# Altium PCB PCB2.PcbDoc
Units mil, origin at the board's own origin, x right, y up, seen from the top; angles counter-clockwise.
Board outline 1960 x 1700 mil, 2 copper layers (Top Layer, Bottom Layer); 12 components, 10 nets, 41 pads, 0 vias.
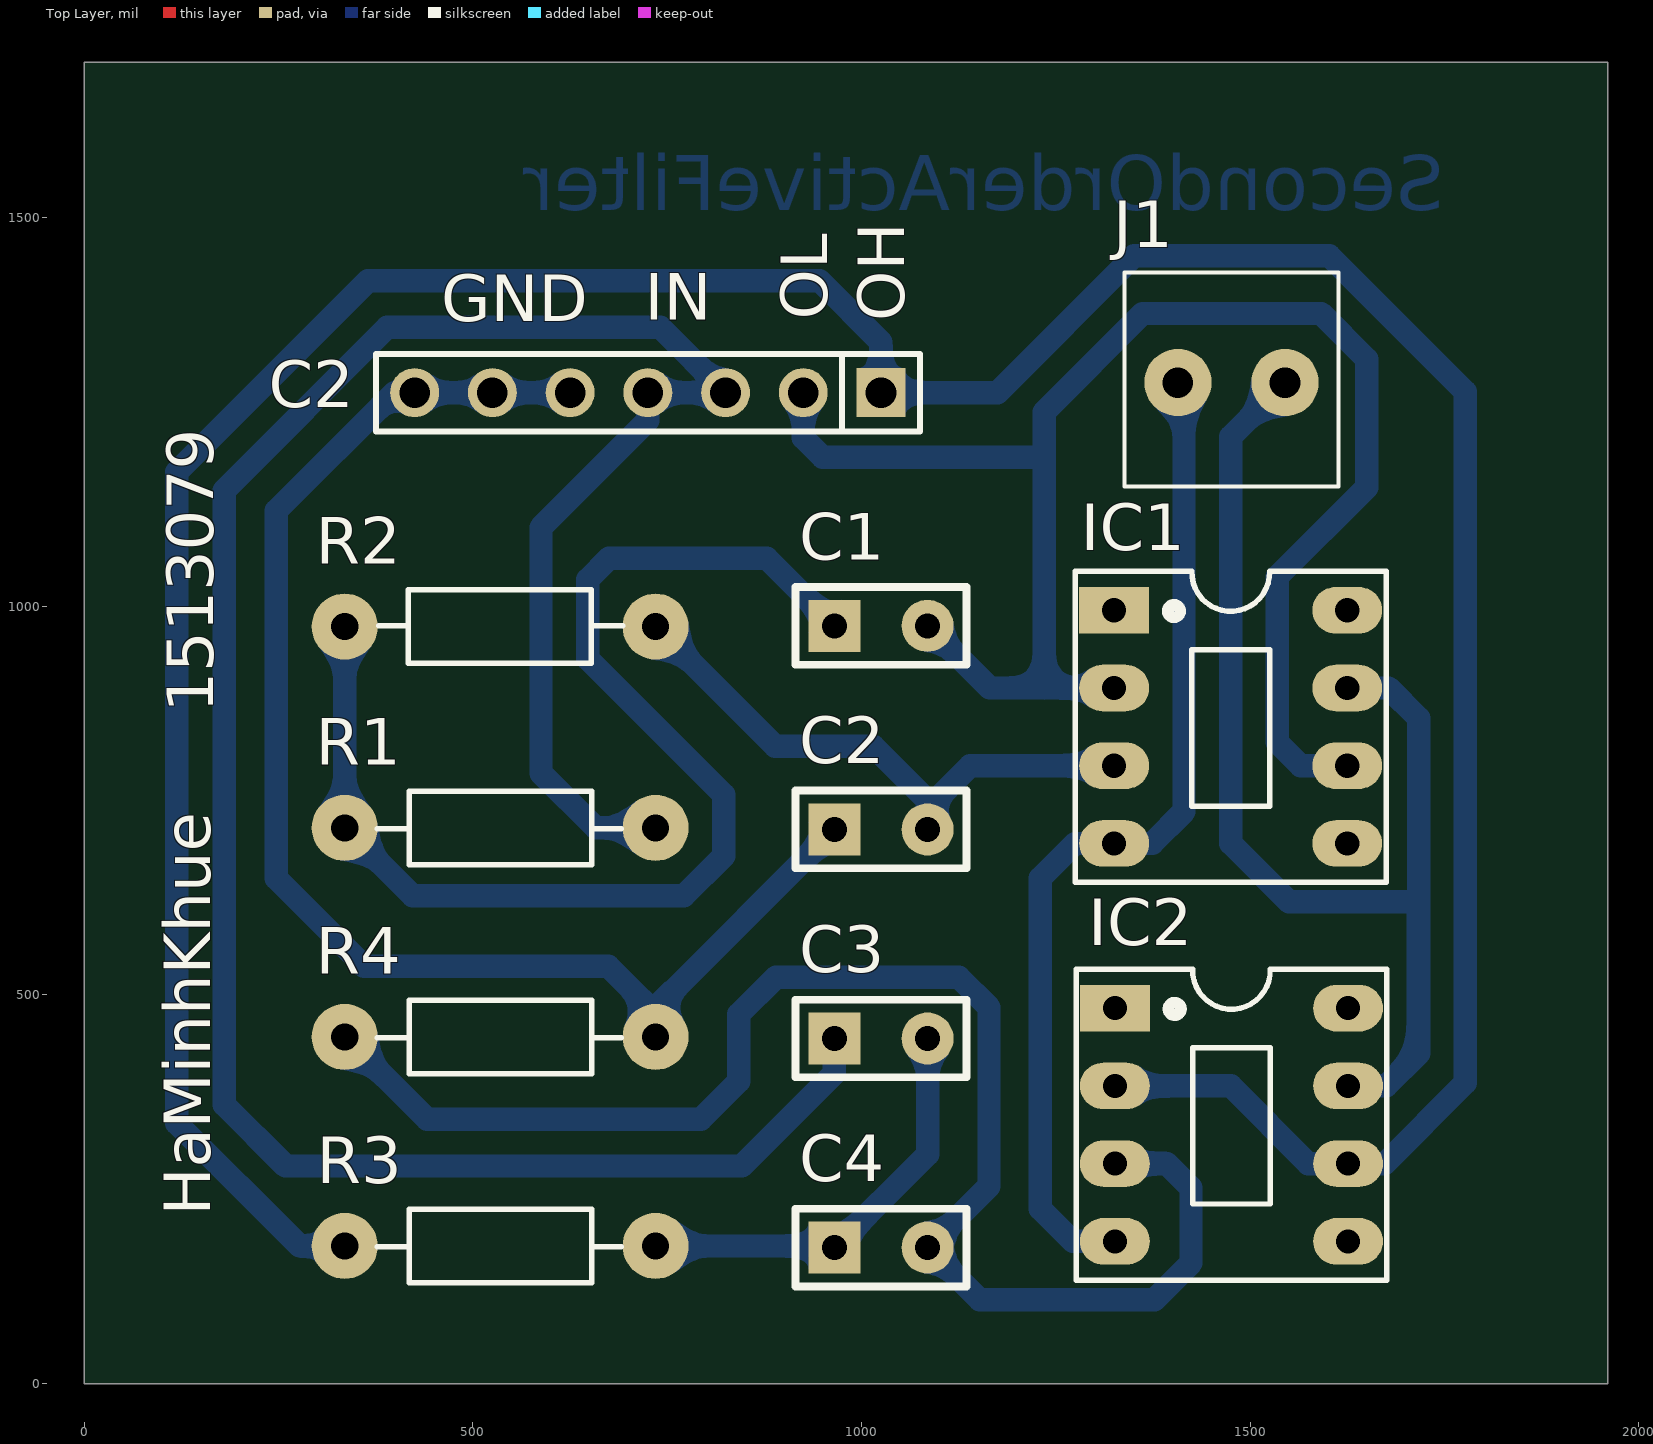
[diagram p0: Top Layer view]
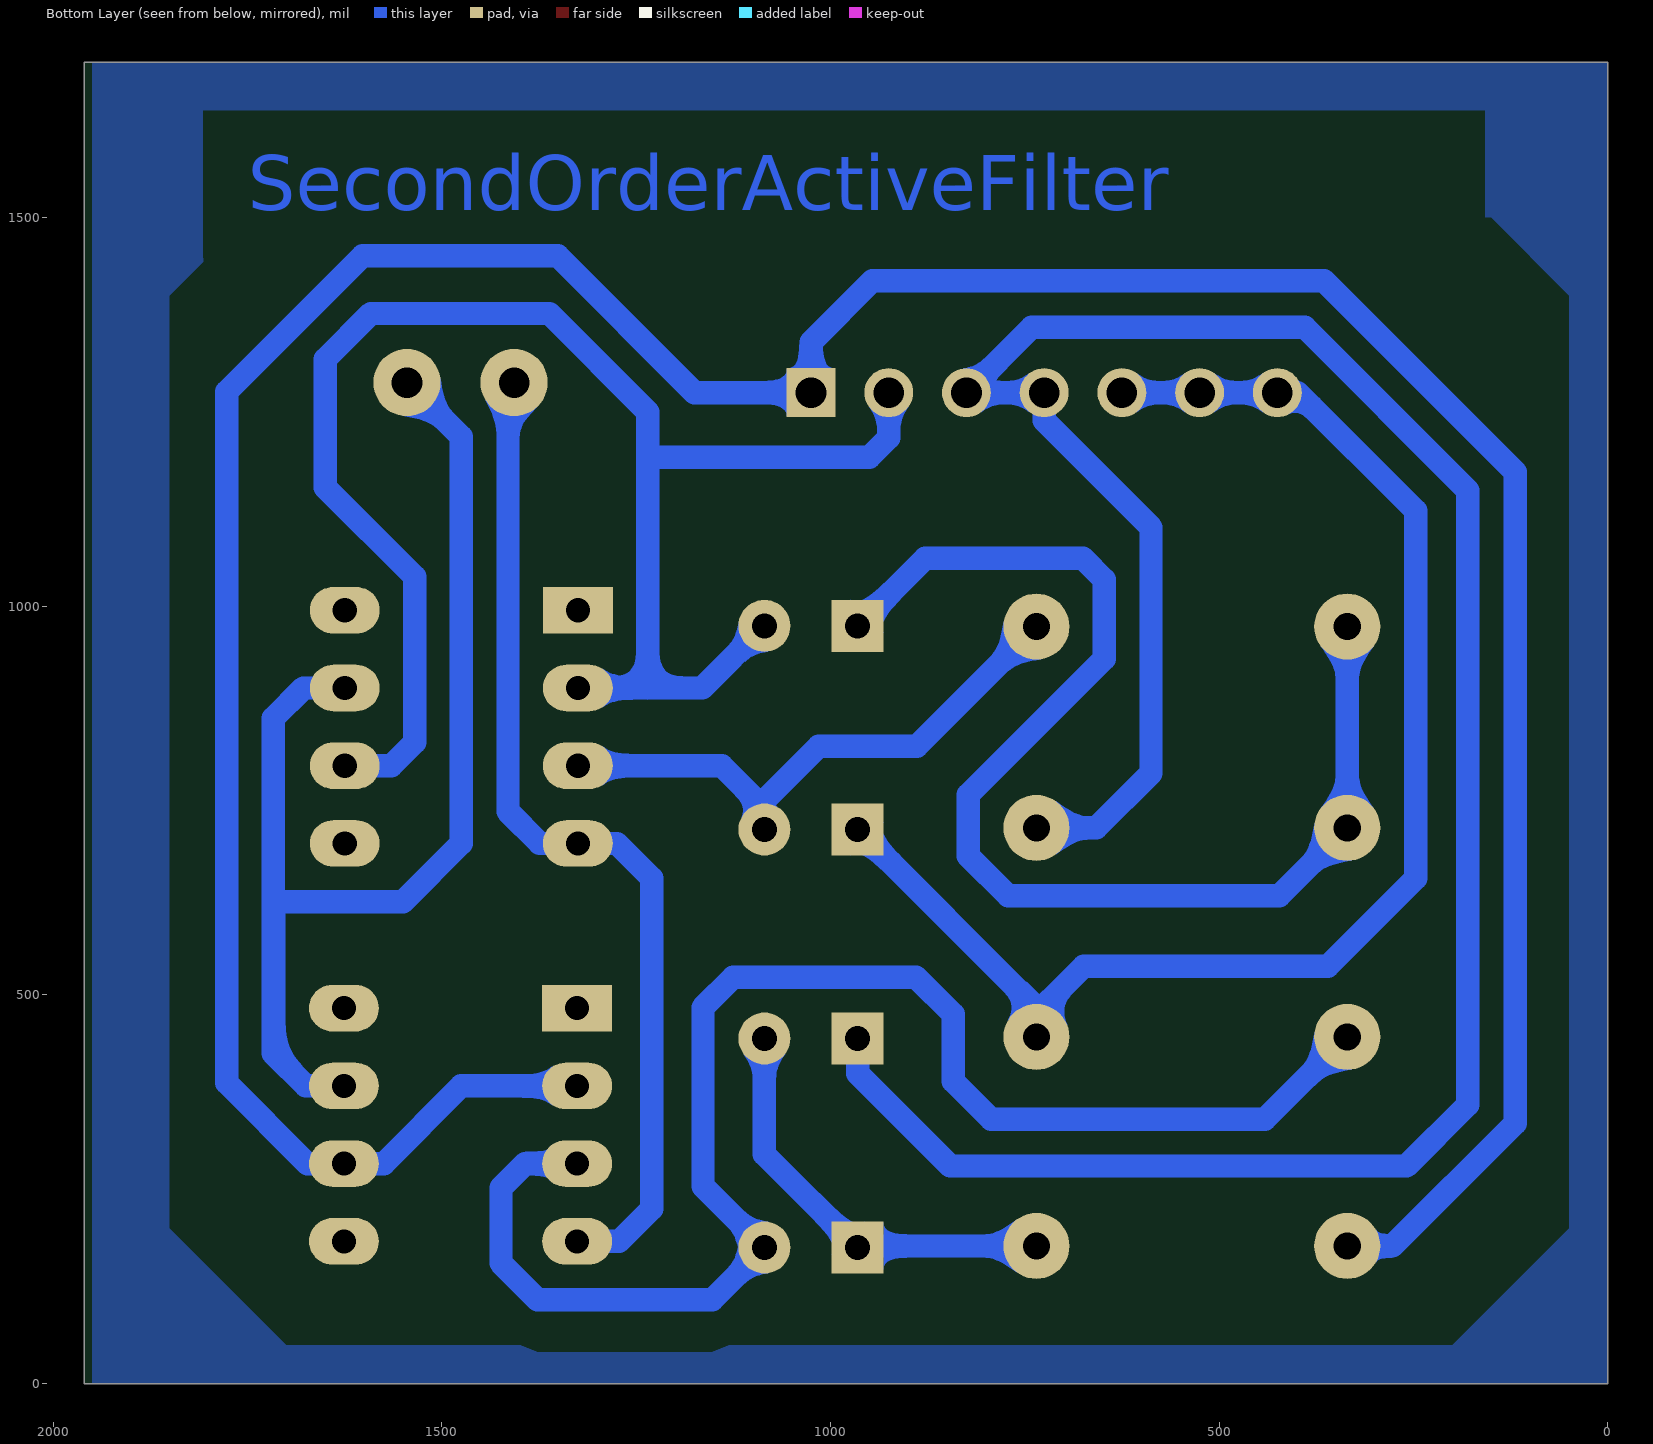
[diagram p1: Bottom Layer view, seen from below]
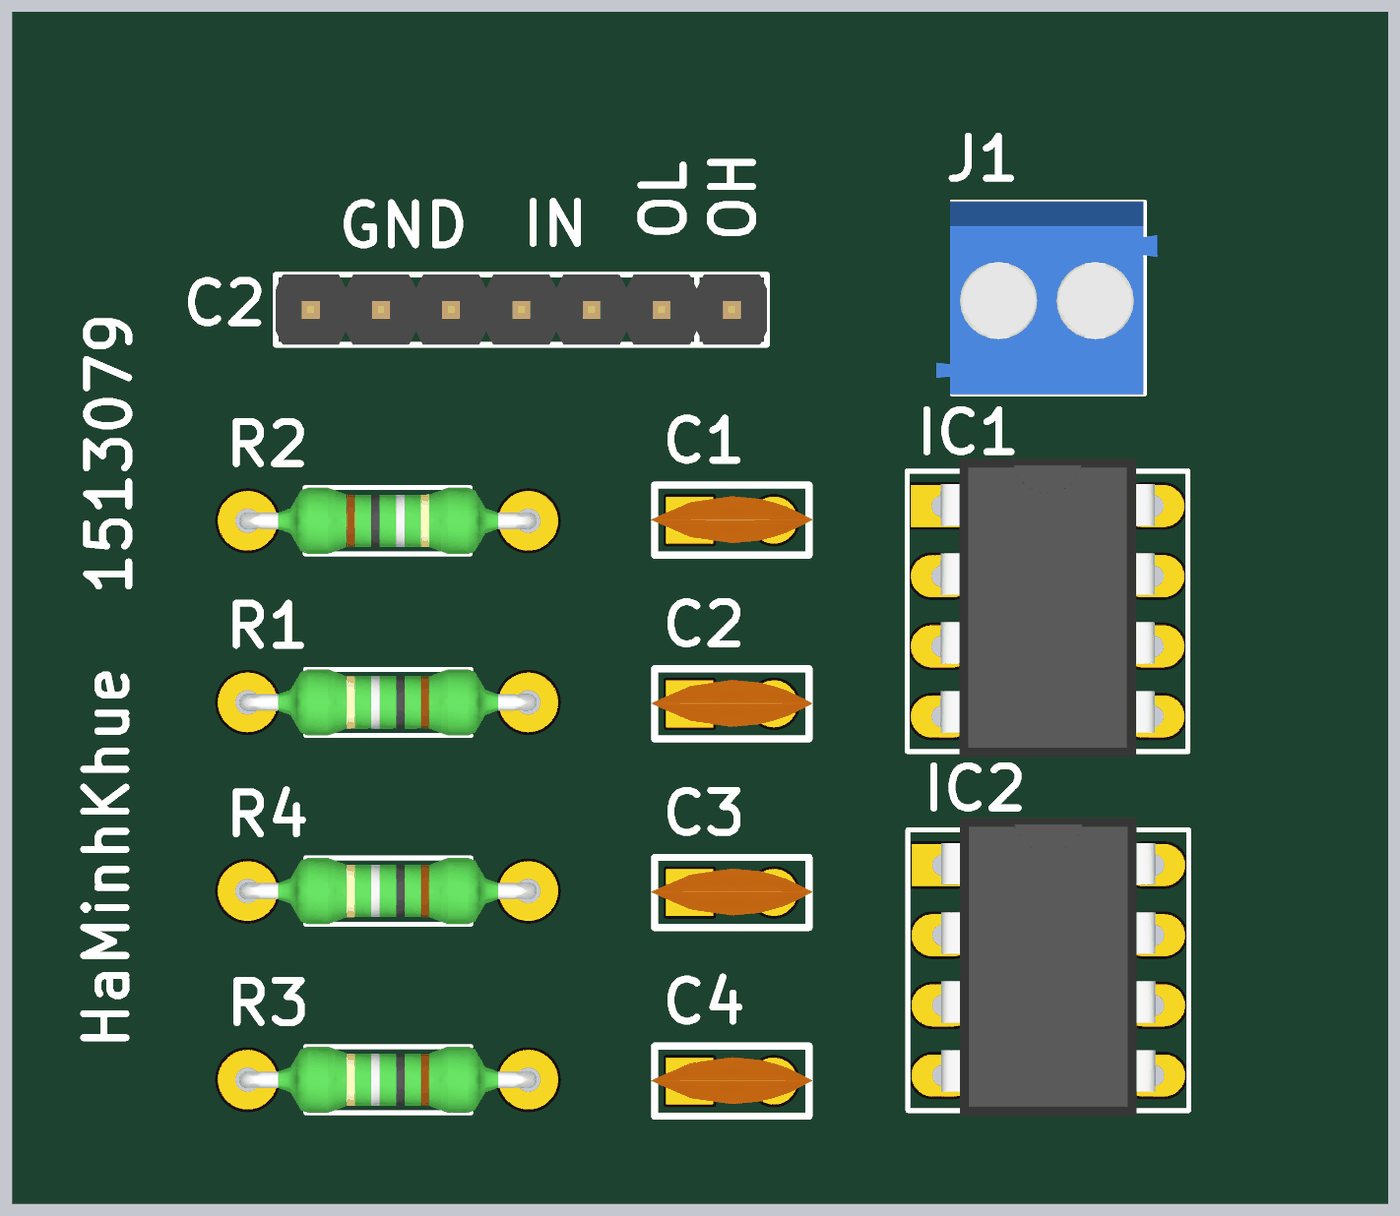
[diagram p2: 3D render of the assembled board from above, using the file's embedded part models]

## Layer stack, top to bottom
Top Solder: solder mask 0.4, Solder Resist, Dk 3.5
Top Layer: signal copper 1.4
Dielectric 1: dielectric 12.6, FR-4, Dk 4.8
Bottom Layer: signal copper 1.4
Bottom Solder: solder mask 0.4, Solder Resist, Dk 3.5

## Board outline
0,0 1960,0 1960,1700 0,1700

## Design rules (kind name [scope] priority, off if disabled: settings)
Clearance Clearance_1 [InPolygon] p1: gap=47.24
Clearance [All] p2: gap=30
PolygonConnect [All] p1: connectstyle=Relief reliefconductorwidth=10 reliefentries=4 polygonreliefangle="90 Angle" airgapwidth=10
RoutingLayers [All] p1: top layer_v5=FALSE bottom layer_v5=TRUE
RoutingVias [All] p1: holewidth=28 width=60 viastyle="Through Hole" minholewidth=28 minwidth=60 maxholewidth=28 maxwidth=60
SolderMaskExpansion [All] p1: expansion=4
Width [All] p1: maxlimit=30 minlimit=20 preferedwidth=30
29 further rules are at their usual default settings.

## Classes and differential pairs
component class Sheet1: C1 C2 C3 C4 IC1 IC2 J1 R1 R2 R3 R4

## Components (designator, comment, footprint, x,y, rotation, side; value= is the part's Value field where it differs from the comment)
C1 "Cap Non-pol" "Cap Non-Pol 3mm" 1025,975 r0 top
C2 "Cap Non-pol" "Cap Non-Pol 3mm" 1025,713 r0 top (schematic designator C3)
C2 "JP7" JP7-D1T 1025,1275 r180 top
C3 "Cap Non-pol" "Cap Non-Pol 3mm" 1025,444 r0 top (schematic designator C4)
C4 "Cap Non-pol" "Cap Non-Pol 3mm" 1025,175 r0 top (schematic designator C5)
IC1 "LM741" DIP8 1475,850 r270 top
IC2 "LM741" DIP8 1476,338 r270 top
J1 "KF2" KF2-3.5 1476,1288 r180 top
R1 "22K" RES-1/4W 550,710 r0 top
R2 "22K" RES-1/4W 520,979 r180 top
R3 "22K" RES-1/4W 550,172 r0 top
R4 "22K" RES-1/4W 550,441 r0 top

## Footprints (in the part's own frame and the unit in brackets; to place one, negate y for a bottom-side part, rotate by r counter-clockwise, add the part's x,y. Pads: shape width x height; smd on the part's side, far side on the other; paste and mask are expansions set on the pad)
"Cap Non-Pol 3mm" [mil] "Capacitor, Radial; Body 5.6 x 2.5 mm (L x W typ); Pin Spacing 3 mm (typ); Solder Pad 35mil"
  rect 67x67 hole 32: 1(-60,0)
  round 67 hole 32: 2(60,0)
  silkscreen extent -110,-50 110,50, body extent -115,-33 115,34, height 245
DIP8 [mil] "DIP, 8-Leads, Row Spacing 7.62mm, Pitch 2.54mm, Body 9.91x6.73mm"
  rect 60x90 hole 31: 1(-145,-150)
  oval 60x90 hole 31: 2(-45,-150) 3(55,-150) 4(155,-150) 5(155,150) 6(55,150) 7(-45,150) 8(-145,150)
  silkscreen extent -195,-200 205,200, body extent -213,-153 213,153, height 177
JP7-D1T [mm] "7 pins, 1 row, straight, gold plating"
  rect 1.6x1.6 hole 1: 1(0,0)
  round 1.6 hole 1: 2(2.54,0) 3(5.08,0) 4(7.62,0) 5(10.16,0) 6(12.7,0) 7(15.24,0)
  silkscreen extent -1.27,-1.27 16.51,1.27, body extent -1.27,-1.27 16.51,1.27, height 8.54
KF2-3.5 [mm] "3,50mm - modular - blue - Horizontal wire entry - Pressure clamp - 8,4mm height - 02p"
  round 2.2 hole 1: 1(-1.75,0) 2(1.75,0)
  silkscreen extent -3.5,-3.6 3.5,3.4, body extent -3.95,-3.6 4.05,3.4, height 8.41
RES-1/4W [mil]
  round 85 hole 35: 1(-215,5) 2(185,5)
  silkscreen extent -173,-42 141,52, body extent -227,-42 197,52, height 95

## Part data
C1 C2 C3 C4: "Non-polarized Capacitor"
C2: "WR-PHD 2.54 mm Angled Socket Header"
IC1 IC2: "Single OA"
R1 R2 R3 R4: library part Res, "Res"

## Nets (pads, with @x,y where several pads share a name; then routed paths per layer and width w, separated by ;. In a path a pad name is that pad's centre, name@x,y a point inside that pad or via, vN(x,y) a via of type N, cw(c..) or ccw(c..) an arc to the next point about the centre after c; other vN are vias at no path point)
GND: C2.1@965,713 C2.5 C2.6 C2.7 R4.2 | length 1866.3
  Bottom Layer w30: C2.5 C2.6 C2.7 399,1275 247,1123 247,650 360,537 674,537 735,476 R4.2 735,483 C2.1@965,713
GND01: IC1.4 IC2.4 J1.2 | length 1314.3
  Bottom Layer w30: IC2.4 1272,183 1230,225 1230,650 1275,695 IC1.4 1374,695 1415,736 1415,1280.1 J1.2
NetC1_1: C1.1 R1.1 R2.2 | length 1597.1
  Bottom Layer w30: R2.2 R1.1 422.5,627.5 771.24,627.5 822.5,678.76 822.5,757.5 647.5,932.5 647.5,1034.5 675,1062 878,1062 C1.1
NetC1_2: C1.2 C2.2@925,1275 IC1.2 IC1.6 | length 2139.8
  Bottom Layer w30: C2.2@925,1275 925,1217 950,1192 1233,1192 ; C1.2 1165,895 IC1.2 ; 1235,895 1235,1250.15 1361.85,1377 1591.15,1377 1650,1318.15 1650,1153 1535,1038 1535,825 1565,795 IC1.6
NetC2_2: C2.1@1025,1275 IC2.2 IC2.6 R3.1 | length 4547
  Bottom Layer w30: R3.1 277,177 119,335 119,1173 365,1419 946,1419 1025,1340 1025,1275 1175,1275 1351,1451 1602,1451 1777,1276 1777,387 1673,283 IC2.6 1575,283 1475,383 IC2.2
NetC2_3: C2.3 C2.4 C3.1 R1.2 | length 3292.1
  Bottom Layer w30: R1.2 658,715 587.5,785.5 587.5,1101.62 725,1239.12 C2.4 C2.3 741,1359 389.85,1359 180,1149.15 180,358.85 258.85,280 846,280 965,399 C3.1
NetC3_2: C2.2@1085,713 IC1.3 R2.1 | length 769.6
  Bottom Layer w30: R2.1 889,820 1015,820 1085,750 1085,713 1085,740 1140,795 IC1.3
NetC4_2: C3.2 C4.1 R3.2 | length 549.5
  Bottom Layer w30: R3.2 963,177 C4.1 1085,295 C3.2
NetC5_2: C4.2 IC2.3 R4.1 | length 1951
  Bottom Layer w30: R4.1 441,340 793,340 842,389 842,475 890,523 1125,523 1164,484 1164,254 C4.2 1152,108 1377,108 1424,155 1424,252 1393,283 IC2.3
VCC: IC1.7 IC2.7 J1.1 | length 1734.1
  Bottom Layer w30: J1.1 1475,1218.1 1475,695 1550,620 1710,620 1716,614 1716,424 ; IC1.7 1678,895 1717,856 1717,425 1716,424 ; IC2.7 1675,383 1716,424
pads on no net: IC1.1 IC1.5 IC1.8 IC2.1 IC2.5 IC2.8

## Polygon pours and split planes (outlines as drawn)
GND on Bottom Layer "Mechanical 1-No Net" (solid, pour order 4): 0,1700 1950,1700 1950,0 0,0 0,1700

## Other copper
Bottom Layer:
  pour cut-out: 50,1400 150,1500 1750,1500 1850,1400 1850,200 1700,50 200,50 50,200
  text "SecondOrderActiveFilter" at 1750,1510 h70.87

## Silkscreen, mask and mechanical layers (free items; w line width, h text height)
Top Overlay:
  text "IN" at 721,1369 h60
  text "OL" at 956,1369 h60 r90
  text "GND" at 459,1367 h60
  text "OH" at 1055,1367 h60 r90
  text "1513079" at 166,863 h60 r90
  text "HaMinhKhue" at 162,216 h60 r90